# EAGLE board Copy of Glorious Stantia-Kasi (EAGLE 7.6.0)

Size 73.58 x 342.79 mm. Coordinates in mm from the lower left corner, seen from the top.
Outline: 0,0 56.82,0 56.82,53.33 0,53.33 0,0
Copper layers (1*16): Top 0.035mm / dielectric 1.5mm / Bottom 0.035mm
Design rules "default": minimum track width 10mil, minimum drill 24mil, track to track 8mil, track to pad 8mil, pad to pad 8mil, via to via 8mil, smd to smd 8mil, copper to edge 40mil, drill to drill 8mil, minimum pad ring 10mil, minimum via ring 8mil, stop-mask expansion 4mil, vias tented up to drill 0mil, thermal gap 10mil

## Footprints (pad centres in the part's own frame; a part is rotated, then mirrored left to right if it is on the bottom)
LED5MM = drill 0.813 octagon: A -1.27,0; K 1.27,0
D-7.5 = drill 0.813 long: A 3.81,0; C -3.81,0
2P-2.54-65/35MIL = drill 0.889 pad 1.651 square: 1 0,1.27 | drill 0.889 pad 1.651: 2 0,-1.27
0207/10 = drill 0.813 octagon: 1 -5.08,0; 2 5.08,0
B25V = drill 0.813 long: A 2.54,0.635; E -2.54,0.635; S 0,0.635
TL1105 = drill 1 pad 1.676: 1 -2.25,3.25; 2 2.25,3.25; 3 -2.25,-3.25; 4 2.25,-3.25
TO92 = drill 0.813 octagon: 1 1.27,0; 2 0,1.905; 3 -1.27,0
ARDUINO_UNO = drill 1.016 pad 1.88: 0 63.5,50.8; 1 60.96,50.8; 2 58.42,50.8; 3 55.88,50.8; 3.3V 35.56,2.54; 4 53.34,50.8; 5 50.8,50.8; 5V 38.1,2.54; 6 48.26,50.8; 7 45.72,50.8; 8 41.656,50.8; 9 39.116,50.8; 10 36.576,50.8; 11 34.036,50.8; 12 31.496,50.8; 13 28.956,50.8; A0 50.8,2.54; A1 53.34,2.54; A2 55.88,2.54; A3 58.42,2.54; A4 60.96,2.54; A5 63.5,2.54; AREF 23.876,50.8; GND 26.416,50.8; GND. 43.18,2.54; GND.. 40.64,2.54; I/OREF 30.48,2.54; N/C 27.94,2.54; RESET 33.02,2.54; SCL 18.796,50.8; SDA 21.336,50.8; VIN 45.72,2.54 | hole 3.2: 66.04,7.62; 66.04,35.56; 15.24,50.8; 13.97,2.54
1X16P-2.54-2.54-11.6-3.0-BLACK-MALE = drill 0.889 pad 1.651 square: 1 0,19.05 | drill 0.889 pad 1.651: 2 0,16.51; 3 0,13.97; 4 0,11.43; 5 0,8.89; 6 0,6.35; 7 0,3.81; 8 0,1.27; 9 0,-1.27; 10 0,-3.81; 11 0,-6.35; 12 0,-8.89; 13 0,-11.43; 14 0,-13.97; 15 0,-16.51; 16 0,-19.05

## Placement (x,y rotation side)
D1  [LED5MM]  5,137.08 0 top
D2  [LED5MM]  5,149.78 0 top
D3  [LED5MM]  5,162.48 0 top
D4  [LED5MM]  5,175.18 0 top
D5  [LED5MM]  5,187.88 0 top
D6  [D-7.5]  5,86.28 0 top
D7  [LED5MM]  5,200.58 0 top
D8  [LED5MM]  5,416.48 0 top  (outside the outline)
M1  [2P-2.54-65/35MIL]  5,124.38 0 top
R1  1k‎Ω  [0207/10]  5,213.28 0 top
R2  220‎Ω  [0207/10]  5,98.98 0 top
R3  22k‎Ω  [0207/10]  5,73.58 0 top
R4  1k‎Ω  [0207/10]  5,225.98 0 top
R5  1k‎Ω  [0207/10]  5,238.68 0 top
R6  1k‎Ω  [0207/10]  5,251.38 0 top
R7  1k‎Ω  [0207/10]  5,264.08 0 top
R8  1k‎Ω  [0207/10]  5,276.78 0 top
R9  200‎Ω  [0207/10]  5,314.88 0 top
R10  1k‎Ω  [0207/10]  5,378.38 0 top  (outside the outline)
R11  1k‎Ω  [0207/10]  5,391.08 0 top  (outside the outline)
R12  1k‎Ω  [0207/10]  5,403.78 0 top  (outside the outline)
R13  1k‎Ω  [0207/10]  5,429.18 0 top  (outside the outline)
Rpot1  250k‎Ω  [B25V]  5,35.48 0 top
Rpot2  250k‎Ω  [B25V]  5,48.18 0 top
Rpot3  10k‎Ω  [B25V]  5,327.58 0 top
S2  [TL1105]  5,340.28 0 top
S3  [TL1105]  5,352.98 0 top  (outside the outline)
S4  [TL1105]  5,365.68 0 top  (outside the outline)
T1  [TO92]  5,111.68 0 top
U1  [ARDUINO_UNO]  5,10.08 0 top
U2  [ARDUINO_UNO]  5,289.48 0 top
U3  [TO92]  5,22.78 0 top
U4  [TO92]  5,60.88 0 top
U5  [1X16P-2.54-2.54-11.6-3.0-BLACK-MALE]  5,302.18 0 top

## Library data of the parts
D1-D8 M1 R1-R13 Rpot1-Rpot3 S2-S4 T1 U1-U5 = AUTODESK_CIRCUITS_BREADBOARD

## Nets
N$1: Rpot2.S U1.A3
N$2: U1.A1 U3.2
N$3: U1.A0 U4.2
N$4: Rpot1.S U1.A2
N$5: R1.1 R4.1 R5.1 R6.1 R7.2 R8.2 Rpot1.E Rpot2.E U1.GND. U3.1 U4.1
N$6: M1.1 R3.1 T1.3
N$7: R2.2 R3.2 T1.2
N$8: D6.C T1.1
N$9: R2.1 U1.3
N$10: D1.K R7.1
N$11: D1.A U1.5
N$12: D2.K R8.1
N$13: D2.A U1.6
N$14: D3.K R6.2
N$15: D3.A U1.8
N$16: D4.K R5.2
N$17: D4.A U1.7
N$18: D5.K R1.2
N$19: D5.A U1.2
N$20: D7.K R4.2
N$21: D7.A U1.4
N$22: U1.GND.. U2.GND..
N$23: U1.0 U2.1
N$24: U1.1 U2.0
N$25: R9.1 U5.15
N$26: U2.2 U5.14
N$27: U2.3 U5.13
N$28: U2.4 U5.12
N$29: U2.5 U5.11
N$30: R9.2 Rpot3.E U2.5V U5.2
N$31: Rpot3.A U2.GND. U5.1 U5.5 U5.16
N$32: Rpot3.S U5.3
N$33: U2.12 U5.4
N$34: U2.11 U5.6
N$35: R10.2 S2.4
N$36: S2.2 U1.13
N$37: S2.1
N$38: R11.1 R12.1 S2.3 U1.3.3V
N$39: S3.2
N$40: S3.1
N$41: R11.2 S3.3 U1.12
N$42: R10.1 R13.1 S3.4 S4.4 U1.GND
N$43: S4.2
N$44: S4.1
N$45: R12.2 S4.3 U1.11
N$46: D8.K R13.2
N$47: D8.A U1.10
N$48: D6.A M1.2 Rpot1.A Rpot2.A U1.5V U3.3 U4.3

## Tracks (layer width: path | path; a pad name or v marks a point on that pad's centre or on a via)
N$1  (1 unrouted)
N$2  (1 unrouted)
N$3  (1 unrouted)
N$4  (1 unrouted)
N$5  (10 unrouted)
N$6  (2 unrouted)
N$7  (2 unrouted)
N$8  (1 unrouted)
N$9  (1 unrouted)
N$10  (1 unrouted)
N$11  (1 unrouted)
N$12  (1 unrouted)
N$13  (1 unrouted)
N$14  (1 unrouted)
N$15  (1 unrouted)
N$16  (1 unrouted)
N$17  (1 unrouted)
N$18  (1 unrouted)
N$19  (1 unrouted)
N$20  (1 unrouted)
N$21  (1 unrouted)
N$22  (1 unrouted)
N$23  (1 unrouted)
N$24  (1 unrouted)
N$25  (1 unrouted)
N$26  (1 unrouted)
N$27  (1 unrouted)
N$28  (1 unrouted)
N$29  (1 unrouted)
N$30  (3 unrouted)
N$31  (4 unrouted)
N$32  (1 unrouted)
N$33  (1 unrouted)
N$34  (1 unrouted)
N$35  (1 unrouted)
N$36  (1 unrouted)
N$38  (3 unrouted)
N$41  (2 unrouted)
N$42  (4 unrouted)
N$45  (2 unrouted)
N$46  (1 unrouted)
N$47  (1 unrouted)
N$48  (6 unrouted)